# Altium PCB G5_Adapted.PcbDoc (part 2 of 2)
Units mil, origin at the board's own origin, x right, y up, seen from the top; angles counter-clockwise.
Board outline 3665.01 x 3900.74 mil, 4 copper layers (Top Layer, Int1, Int2, Bottom Layer), stack 53.912 mil thick; 133 components, 90 nets, 479 pads, 177 vias.
Unrouted connection lines stored in the file: 1.
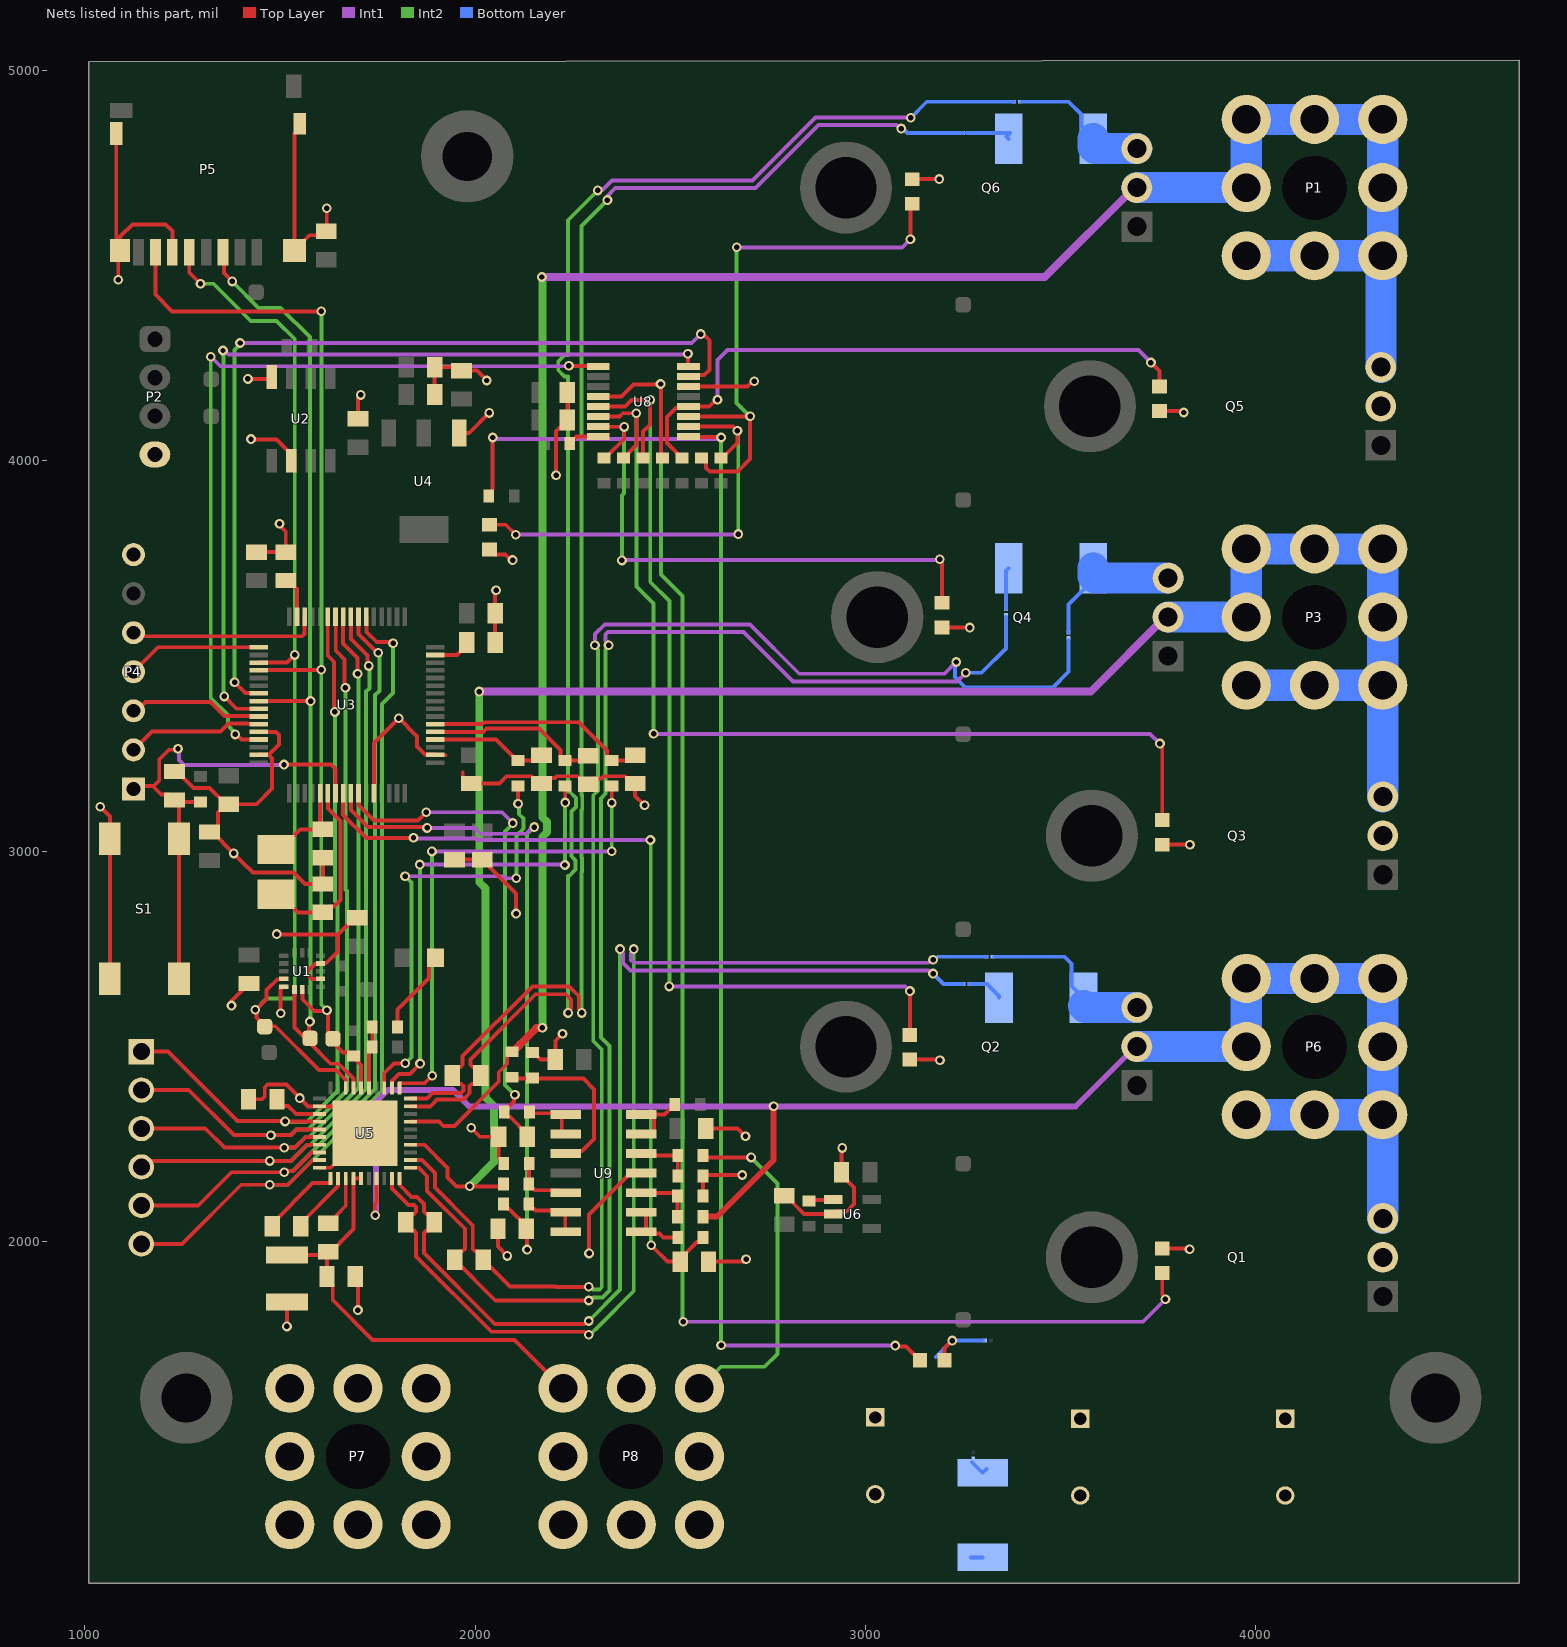
[diagram p4: the nets of this part, all layers, seen from the top]

## Via types
v1: diameter 25, hole 14, Top Layer to Bottom Layer, 177 vias

## Nets (pads, with @x,y where several pads share a name; then routed paths per layer and width w, separated by ;. In a path a pad name is that pad's centre, name@x,y a point inside that pad or via, vN(x,y) a via of type N, cw(c..) or ccw(c..) an arc to the next point about the centre after c; other vN are vias at no path point) (continued)
GND: C2.2 C3.2 C4.2 C6.2 C7.2 C11.1 C12.2 C13.1 C15.1 C17.2 C18.2 C19.2 C20.2 C21.2 C22.2 C23.2 C24.2 C25.2 C27.1 C28.1 C29.2 C30.2 C31.2 C33.2 C34.1 C35.1 C37.2 C38.1 C39.1 C40.1 C41.1 C42.2 C43.2 C44.1 NT2.2 NT6.2 NT8.2 NT10.2 P2.4 P4.7 P5.6 P5.11 P5.12 P5.13 P5.14 P7.1 R7.1 R9.1 R15.1 R17.1 R19.1 R34.1 R35.1 R36.1 RT1.2 RT2.2 RT3.2 RT4.2 RT5.2 RT6.2 RT7.2 RT8.2 S1.2 U1.5 U1.10 U1.12 U2.2 U2.8 U3.12 U3.18 U3.60 U3.63 U4.1 U5.32 U5.40 U5.41 U6.2 U8.14 U9.11 | length 8836.9
  Top Layer w10: v1(1040,3114) 1064.42,3089.58 S1.2@1064.42,3032.13 S1.2@1064.42,2673.87 ; P5.12@1080.75,4838.5 1080.75,4549.13 P5.13@1090.59,4539.29 ; v1(1086,4464) 1086,4534.7 P5.13@1090.59,4539.29 ; P5.6@1224.45,4534.37 1224.45,4588.55 1207,4606 1122,4606 1090.59,4574.59 P5.13@1090.59,4539.29 ; C19.2@1230,3204.42 1236.89,3204.42 1278.81,3162.5 1320.19,3162.5 C25.2@1362.11,3120.58 ; C34.1@1320,3049.42 C34.1@1326.89,3049.42 ; v1(1376,2605) 1376,2616.58 C15.1@1421,2661.58 ; v1(1418,4210) 1473.74,4210 U2.8@1478.94,4215.2 ; C3.2@1419.58,2365 1454.27,2365 1461.22,2371.95 1461.22,2395.62 1468.18,2402.57 1516.66,2402.57 1551,2368.23 v1(1551,2368) 1572.1,2346.9 U5.32@1601.86,2346.9 1649.1,2346.9 U5.41@1718,2278 1629.59,2189.59 1619.94,2189.59 1619.85,2189.5 1601.94,2189.5 U5.40@1601.86,2189.42 ; v1(1426,4056) 1427,4055 1491.3,4055 1528.94,4017.36 U2.2@1528.94,4000.63 ; C24.2@1440,3766.42 C11.1@1515,3766.42 1515,3818.94 1499,3834.94 v1(1499,3839) ; U3.60@1445.47,3306.1 1489.9,3306.1 1497.86,3298.14 1497.86,3274.03 1471.78,3247.95 1446.38,3247.95 U3.63@1445.47,3247.05 1446.38,3246.14 1471.78,3246.14 1480.09,3237.82 1480.09,3161.09 1439.58,3120.58 C25.2@1369,3120.58 C25.2@1362.11,3120.58 ; v1(1492,2788) 1493.17,2786.83 1648.52,2786.83 ; v1(1502,2585) 1502,2645.87 U1.5@1509.76,2653.63 ; v1(1518,1783) C27.1@1518,1845.96 ; P5.11@1551.22,4864.09 1551.22,4852.28 1537.44,4838.5 P5.14@1537.44,4539.29 1576.11,4577.96 1608.54,4577.96 C13.1@1619,4588.42 1620,4589.42 v1(1620,4647) ; U1.10@1604.24,2673.32 1582.68,2673.32 1571.13,2684.87 1571.13,2693.16 1589.75,2711.78 1603.34,2711.78 U1.12@1604.24,2712.68 1605.15,2713.59 1618.74,2713.59 1648.52,2743.37 1648.52,2786.83 ; C18.2@1610,2983.58 C17.2@1610,2916.42 1563.78,2916.42 1534.93,2945.27 1431.03,2945.27 1405.8,2970.51 v1(1381.65,2994.65) C34.1@1326.89,3049.42 ; C28.1@1691,1913.42 C28.1@1693.42,1911 1700,1904.42 v1(1700,1825) ; C7.2@1698,2829.42 1691.11,2829.42 1648.52,2786.83 ; C30.2@1700,4107.83 1700,4162 v1(1707,4169) ; 1741.65,3174.93 1741.65,3149.53 U3.12@1740.75,3148.62 1740.75,3277.04 v1(1804.71,3341) 1851.5,3294.21 1851.5,3268.38 1871.92,3247.95 1897.32,3247.95 U3.18@1898.23,3247.05 1899.13,3246.14 1924.53,3246.14 ; C42.2@1896.42,4170 C31.2@1896.42,4240 1956.42,4240 C43.2@1965,4231.42 2004.58,4231.42 v1(2030,4206) ; C20.2@1947,2978.58 C21.2@2018,2978.58 2105.07,2891.52 v1(2105.07,2840.48) ; U4.1@1959.49,4071.93 1984.93,4071.93 v1(2036,4123) ; 1968.43,3202.25 1968.43,3188.27 1983.11,3173.58 C22.2@1990,3173.58 ; C22.2@1983.06,3166.64 C22.2@1990,3173.58 ; v1(1990,2292) 2013,2269 C39.1@2060.58,2269 2060.58,2215.89 2073.52,2202.95 R35.1@2073.52,2200 R35.1@2073.52,2197.05 ; RT7.2@2037,3773.5 2049.72,3760.79 2077.15,3760.79 2091.94,3746 v1(2096,3746) ; C41.1@2047.74,2043.84 C41.1@2058.58,2033 2058.58,1987.31 v1(2082.13,1963.76) ; C12.2@2051.42,3535 C23.2@2051.42,3610 2051.42,3666.82 v1(2053.62,3669.02) ; R34.1@2147,2484.48 2149.95,2484.48 2167.43,2467 C44.1@2205.58,2467 2205.58,2514.72 v1(2223.84,2532.98) ; v1(2207.39,3963.33) 2207.39,4075.97 C35.1@2236.42,4105 C37.2@2236.42,4175 ; v1(2292,1970) 2292,2070 2398,2176 U9.11@2426,2176 ; v1(2434,3118) 2410,3142 C6.2@2410,3173.58 2403.11,3173.58 2384.39,3192.3 2328.71,3192.3 2323.26,3186.85 2304.69,3186.85 C4.2@2290,3172.17 2283.11,3172.17 2262.98,3192.3 2208.71,3192.3 2204.68,3188.27 2184.69,3188.27 C2.2@2170,3173.58 2163.11,3173.58 2144.39,3192.3 2080.79,3192.3 2062.07,3173.58 C22.2@1990,3173.58 ; U8.14@2546.73,4190.47 2697.41,4190.47 2710.94,4204 v1(2715,4204) ; R36.1@2583.48,2117 2583.72,2117.24 2583.72,2167.76 R9.1@2583.96,2168 2586.96,2171 v1(2684,2171) ; C38.1@2590.42,2290 2672.58,2290 v1(2692.54,2270.03) ; C40.1@2597.83,1949 2688,1949 v1(2694,1955) ; C33.2@2792,2117.42 2798.89,2117.42 2813.57,2102.73 2813.57,2099.84 2842.41,2071 U6.2@2917.79,2071 2924.6,2077.81 2951.81,2077.81 2971,2097 2971,2138.69 2938.58,2171.11 C29.2@2938.58,2178 2938.58,2238.66 v1(2940.15,2240.22) ; RT2.2@3113,2466.5 3188.8,2466.5 v1(3190.51,2464.79) ; RT6.2@3120,4721.5 3120.5,4722 v1(3189,4722) ; RT4.2@3196,3573.5 3196.5,3573 v1(3267,3573) ; RT8.2@3202.5,1696 3202.5,1727.5 v1(3222,1747) ; RT5.2@3753,4127.5 3811.5,4127.5 v1(3815,4124) ; RT1.2@3760,1982.99 3828.01,1982.99 v1(3830,1981) ; RT3.2@3760,3017.01 v1(3831,3017) ; C34.1@1326.89,3049.42 1341.57,3064.1 1341.57,3100.05 C25.2@1362.11,3120.58
  Bottom Layer w10: 3180,1705 v1(3222,1747) NT2.2@3301,1747 ; NT10.2@3260,4840 NT10.2@3265,4840 3370,4840 3361,4831 3360.73,4831 R19.1@3366.73,4825 ; NT6.2@3266,2660 3311.3,2660 3341.73,2629.57 R15.1@3341.73,2625 ; R7.1@3270.47,1191.73 R7.1@3300,1191.73 ; NT8.2@3360,3620 3360,3718.27 R17.1@3366.73,3725
GPIO1: U3.61 U8.1 | length 2063.1
  Top Layer w10: v1(1385.35,3299.5) 1388.83,3299.5 1401.91,3286.42 U3.61@1445.94,3286.42 ; v1(2240.38,4243.56) 2241.33,4242.61 2314.44,4242.61 U8.1@2315.39,4241.65
  Int1 w10: v1(1323,4267) 1347.5,4242.5 2239.31,4242.5 v1(2240.38,4243.56)
  Int2 w10: v1(1323,4267) 1323,3392.54 1366.7,3348.85 1366.7,3322.21 1385.35,3303.56 v1(1385.35,3299.5)
GPIO2: U3.57 U8.16 | length 2217.9
  Top Layer w10: v1(1357.72,3396.72) 1389.28,3365.16 U3.57@1445.94,3365.16 ; v1(2545.11,4274.5) 2545.11,4243.28 U8.16@2546.73,4241.65
  Int1 w10: v1(1354.23,4282.8) 1358.29,4282.8 1368.09,4273 2543.61,4273 v1(2545.11,4274.5)
  Int2 w10: v1(1354.23,4282.8) 1355.97,4281.05 1355.97,3398.46 v1(1357.72,3396.72)
GPIO3: U3.55 U8.15 | length 2303
  Top Layer w10: v1(1384,3433) 1411.57,3405.43 1445.04,3405.43 U3.55@1445.94,3404.53 ; U8.15@2546.73,4216.06 2550.59,4219.92 2586.92,4219.92 2600,4233 2600,4309 2584,4325 v1(2578,4325)
  Int1 w10: v1(1398,4302) 2555,4302 v1(2578,4325)
  Int2 w10: v1(1384,3433) 1384,4283.94 1398,4297.94 v1(1398,4302)
INHA: ?.1 U3.43 U5.34 | length 1924.5
  Top Layer w10: ?.1@1145,2486.85 1213.15,2486.85 1391,2309 1512.4,2309 1513.8,2307.61 1601.78,2307.61 U5.34@1601.86,2307.53 ; U3.43@1622.64,3600.91 1622.64,3501.86 1639,3485.5 1639,3359 v1(1641,3357)
  Int2 w10: v1(1513.18,2308.22) 1514.4,2307 1568.86,2307 1648,2386.14 1648,2866.04 1641,2873.04 v1(1641,3357)
INHB: ?.3 U3.41 U5.36 | length 1965.3
  Top Layer w10: ?.3@1145,2290 1308.91,2290 1357.91,2241 v1(1511,2241) 1539.05,2241 1566.21,2268.16 U5.36@1601.86,2268.16 ; U3.41@1662.01,3600.91 1662.01,3531.99 1698.85,3495.15 v1(1698.85,3454.89)
  Int2 w10: v1(1511,2241) 1539,2241 1567,2269 1576.12,2269 1701.42,2394.3 1701.42,3452.33 v1(1698.85,3454.89)
INHC: ?.5 U3.39 U5.38 | length 2071.7
  Top Layer w10: ?.5@1145,2093.15 1290.98,2093.15 1375.83,2178 v1(1511,2178) 1513.87,2180.87 1533.47,2180.87 1581.31,2228.71 1601.78,2228.71 U5.38@1601.86,2228.79 ; U3.39@1701.38,3600.91 1701.38,3556.87 1749.88,3508.37 v1(1751.88,3508.37)
  Int2 w10: v1(1511,2178) 1513.87,2180.87 1533.24,2180.87 1744,2391.63 1744,3400 1755,3411 1755,3478.73 1754.75,3478.98 1754.75,3505.5 v1(1751.88,3508.37)
INLA: ?.2 U3.42 U5.35 | length 1978.9
  Top Layer w10: ?.2@1145,2388.43 1266.57,2388.43 1382,2273 v1(1477,2273) 1528.17,2273 1543.01,2287.84 U5.35@1601.86,2287.84 ; U3.42@1642.32,3600.91 1643,3600.23 1643,3514 1665.7,3491.3 1665.7,3421.02 v1(1667.77,3418.95)
  Int2 w10: v1(1477,2273) 1528,2273 1543,2288 1572.49,2288 1672,2387.51 1672,2899.08 1668.5,2902.58 1668.5,3418.22 v1(1667.77,3418.95)
INLB: ?.4 U3.40 U5.37 | length 2036.1
  Top Layer w10: ?.4@1145,2191.57 1159.87,2191.57 1175.36,2207.06 1527.74,2207.06 1569.15,2248.47 U5.37@1601.86,2248.47 ; U3.40@1681.69,3600.91 1681.69,3544.31 1724.63,3501.37 1724.63,3477.87 v1(1727.5,3475)
  Int2 w10: v1(1474.13,2207.06) 1528.06,2207.06 1569,2248 1577.75,2248 1721,2391.25 1721,3409 1729,3417 1729,3473.5 v1(1727.5,3475)
INLC: ?.6 U3.38 U5.39 | length 2210.5
  Top Layer w10: ?.6@1145,1994.72 1249.72,1994.72 1401,2146 v1(1474,2146) 1521.23,2146 1584.25,2209.02 1601.78,2209.02 U5.39@1601.86,2209.1 ; U3.38@1721.06,3600.91 1721.97,3600 1721.97,3561.86 1747.96,3535.87 1787.13,3535.87 v1(1790,3533)
  Int2 w10: v1(1474,2146) 1521,2146 1761.21,2386.21 1761.21,3377.21 1790,3406 v1(1790,3533)
ISENA: C2.1 R20.2 U3.20 | length 300.4
  Top Layer w10: U3.20@1897.76,3286.42 2053.11,3286.42 2107.05,3232.48 R20.2@2110,3232.48 2156.06,3232.48 C2.1@2170,3246.42
ISENB: C4.1 R21.2 U3.21 | length 445.8
  Top Layer w10: U3.21@1897.76,3306.1 2020.52,3306.1 2028.92,3314.5 2163.73,3314.5 2218.27,3259.97 2218.27,3241.26 2227.05,3232.48 R21.2@2230,3232.48 2277.48,3232.48 C4.1@2290,3245
ISENC: C6.1 R22.2 U3.22 | length 570.7
  Top Layer w10: U3.22@1897.76,3325.79 2017.58,3325.79 2022.29,3330.5 2266.32,3330.5 2338.27,3258.55 2338.27,3241.26 2347.05,3232.48 R22.2@2350,3232.48 2396.06,3232.48 C6.1@2410,3246.42
MA: P6.1 Q1.3 Q2.2 R33.1 U5.7 | length 4576.3
  Top Layer w10: v1(1744,2068) 1744,2096.97 1747.53,2100.5 U5.7@1747.53,2161.86
  Top Layer w15: R33.1@2583.48,2064 2583.81,2064.33 2619.76,2064.33 2764.5,2209.07 v1(2764.5,2346.78)
  Int1 w15: v1(1744,2068) 1745.91,2069.91 1745.91,2091.51 1746.06,2091.66 1746.06,2358.06 1777,2389 1942.7,2389 1985.35,2346.35 3537.94,2346.35 3691.59,2500 Q2.2@3695.08,2500
  Bottom Layer w80: Q2.2@3695.08,2500 P6.1@3975.39,2500 P6.1@3975.39,2674.61 P6.1@4150,2674.61 P6.1@4324.61,2674.61 P6.1@4324.61,2500 P6.1@4324.61,2325.39 ; P6.1@3975.39,2325.39 P6.1@4150,2325.39 P6.1@4324.61,2325.39 ; Q1.3@4325.08,2060 4325.08,2324.92 P6.1@4324.61,2325.39
MB: P3.1 Q3.3 Q4.2 R32.1 U5.14 | length 5159.8
  Top Layer w10: U5.14@1834.14,2248.47 1869.9,2248.47 1929,2189.37 1929,2165 1952,2142 v1(1986,2142) 2066.52,2142 R32.1@2072.52,2148
  Int1 w20: v1(2010.51,3409.13) 3577.11,3409.13 3767.98,3600 Q4.2@3775,3600
  Int2 w20: v1(1986,2142) 2048.5,2204.5 2048.5,2347.12 2027,2368.62 2027,2904.72 2010.51,2921.21 v1(2010.51,3409.13)
  Bottom Layer w80: Q4.2@3775,3600 P3.1@3975.39,3600 P3.1@3975.39,3774.61 P3.1@4150,3774.61 P3.1@4324.61,3774.61 P3.1@4324.61,3600 P3.1@4324.61,3425.39 ; P3.1@3975.39,3425.39 P3.1@4150,3425.39 P3.1@4324.61,3425.39 ; Q3.3@4325.08,3140 4325.08,3424.92 P3.1@4324.61,3425.39
MC: P1.1 Q5.3 Q6.2 R30.1 U5.17 | length 5815.9
  Top Layer w10: U5.17@1834.14,2307.53 1907.7,2307.53 1918.39,2296.84 1947.08,2296.84 2060.46,2410.23 2060.46,2434.05 2082.27,2455.86 2082.27,2477.7 2091.05,2486.48 R30.1@2094,2486.48
  Top Layer w20: R30.1@2094,2486.48 2096.95,2486.48 2114.27,2503.8 2114.27,2504.89 2156.54,2547.16 2171.35,2547.16 v1(2172.31,2548.12)
  Int1 w20: v1(2171.05,4471.04) 3459.09,4471.04 3688.05,4700 Q6.2@3695.08,4700
  Int2 w20: v1(2171.05,4471.04) 2172.31,4469.78 2172.31,3087.37 2184,3075.68 2184,3048.76 2172.31,3037.06 v1(2172.31,2548.12)
  Bottom Layer w80: Q6.2@3695.08,4700 P1.1@3975.39,4700 P1.1@3975.39,4874.61 P1.1@4150,4874.61 P1.1@4324.61,4874.61 P1.1@4324.61,4700 P1.1@4324.61,4525.39 ; P1.1@3975.39,4525.39 P1.1@4150,4525.39 P1.1@4324.61,4525.39 ; Q5.3@4320,4240 4320,4520.79 P1.1@4324.61,4525.39
NetC1_1: C1.1 U5.1 | length 210.2
  Top Layer w10: C1.1@1480.58,2040 1480.58,2046.89 1583.82,2150.13 1629.34,2150.13 1629.42,2150.2 U5.1@1629.42,2161.86
NetC1_2: C1.2 U5.2 | length 161.5
  Top Layer w10: C1.2@1553.42,2040 1553.42,2046.89 1649.02,2142.5 1649.02,2161.78 U5.2@1649.1,2161.86
NetC3_1: C3.1 U5.33 | length 141.6
  Top Layer w10: C3.1@1490.02,2379 1490.02,2364.86 1507.1,2347.77 1521.24,2347.77 1541.81,2327.21 U5.33@1601.86,2327.21
NetC5_1: C5.1 U5.3 | length 137
  Top Layer w10: C5.1@1624,2047.42 1630.89,2047.42 1645.57,2062.1 1645.57,2068.99 1668.79,2092.2 U5.3@1668.79,2161.86
NetC10_2: C10.2 C14.2 C16.2 NT1.2 R7.2 | length 52.3
  Bottom Layer w10: R7.2@3273,1435.27 R7.2@3300,1408.27 R7.2@3310,1418.27
NetC11_2: C11.2 U3.47 | length 108.7
  Top Layer w10: C11.2@1515,3693.58 1521.89,3693.58 1543.9,3671.57 U3.47@1543.9,3600.91
NetC12_1: C12.1 U3.31 | length 98.1
  Top Layer w10: U3.31@1897.76,3502.95 1953.43,3502.95 1978.58,3528.11 C12.1@1978.58,3535
NetC17_1: C17.1 U3.6 Y1.1 | length 484.7
  Top Layer w10: Y1.1@1490,2890 1499.84,2890 1546.26,2843.58 C17.1@1610,2843.58 1624.69,2858.27 1638.27,2858.27 1655,2875 1655,3077.75 1623.54,3109.2 1623.54,3148.19 U3.6@1622.64,3149.09
NetC18_1: C18.1 U3.5 Y1.2 | length 236.9
  Top Layer w10: Y1.2@1490,3005 1499.84,3005 1551.26,3056.42 C18.1@1610,3056.42 1602.95,3063.46 U3.5@1602.95,3149.09
NetD1_1: D1.1 R3.1 | length 217.5
  Top Layer w10: R3.1@1801.48,2550 1801.48,2595.22 1881.61,2675.35 1881.61,2710.8 D1.1@1898.27,2727.46
NetNT5_2: NT5.2 Q2.3 R15.2 | length 464.1
  Bottom Layer w10: 3330,2730 3510,2730 3527.83,2712.17 3527.83,2655.43 R15.2@3558.27,2625 R15.2@3558.27,2604.61
  Bottom Layer w80: R15.2@3558.27,2604.61 3562.83,2600.04 3695.04,2600.04 Q2.3@3695.08,2600
NetNT7_2: NT7.2 Q4.3 R17.2 | length 383.6
  Bottom Layer w10: NT7.2@3520,3561 3520,3632 ; 3520,3632.2 3583.27,3695.47 R17.2@3583.27,3704.61
  Bottom Layer w80: R17.2@3583.27,3725 3583.27,3704.61 3587.83,3700.04 3747.83,3700.04 3747.87,3700 Q4.3@3775,3700
NetNT9_2: NT9.2 Q6.3 R19.2 | length 375.3
  Bottom Layer w10: 3400,4920 3520,4920 3552.83,4887.17 3552.83,4855.43 R19.2@3583.27,4825
  Bottom Layer w80: R19.2@3583.27,4825 3583.27,4804.61 3587.83,4800.04 3695.04,4800.04 Q6.3@3695.08,4800
NetR9_2: R9.2 R13.1 U9.12 | length 120
  Top Layer w10: U9.12@2452,2221 R13.1@2519,2221 R9.2@2519,2168
NetR11_1: R11.1 U6.1 | length 64.4
  Top Layer w10: R11.1@2855,2104.48 2856.96,2106.44 2915.83,2106.44 U6.1@2917.79,2108.4
NetR18_1: R18.1 U9.13 U9.14 | length 155.6
  Top Layer w10: U9.14@2426,2326 2437.64,2326 U9.14@2454,2326 ; U9.13@2458,2274 2458,2320 2452,2326 2451.43,2326 2485.52,2326 2499.79,2340.27 2502.74,2340.27 2511.52,2349.05 R18.1@2511.52,2352
NetR23_1: R23.1 U8.8 | length 81.9
  Top Layer w10: R23.1@2242.48,4045 2242.48,4047.95 2251.26,4056.73 2254.21,4056.73 2260,4062.52 U8.8@2315.39,4062.52
NetR27_1: R27.1 U9.1 U9.2 | length 143
  Top Layer w10: R27.1@2139.48,2332 2142.48,2329 U9.1@2222,2329 ; U9.2@2222,2281 U9.1@2222,2329 ; U9.1@2232,2326 2229,2329 U9.1@2222,2329
NetR28_1: R28.1 U9.6 U9.7 | length 150.4
  Top Layer w10: R28.1@2137.48,2097 2137.48,2094.05 2146.26,2085.27 2149.21,2085.27 2154.48,2080 2226,2080 U9.6@2230,2076 ; U9.7@2231,2029 2231,2075 U9.6@2232,2076
NetR29_1: R29.1 U9.8 U9.9 | length 149.2
  Top Layer w10: U9.8@2426,2026 2431.11,2020.89 2472.11,2020.89 2482,2011 R29.1@2519,2011 ; U9.8@2438,2021 U9.9@2438,2071
NetR30_2: R30.2 R34.2 U9.3 | length 433.4
  Top Layer w10: R30.2@2099.96,2418 2147,2418 2277.14,2418 2305,2390.14 2305,2263 2274,2232 2239.43,2232 U9.3@2231.43,2224
NetR32_2: R32.2 R35.2 U9.5 | length 136.3
  Top Layer w10: R35.2@2138.48,2200 2137.98,2199.5 2137.98,2148.5 R32.2@2137.48,2148 2137.48,2145.05 2146.26,2136.27 2149.21,2136.27 2153.48,2132 U9.5@2213,2132
NetR33_2: R33.2 R36.2 U9.10 | length 115.5
  Top Layer w10: U9.10@2460,2125 2510.52,2125 R36.2@2518.52,2117 2518.52,2064.48 2519,2064 R33.2@2518.52,2064
nFAULT: R2.2 R3.2 U5.25 | length 159.5
  Top Layer w10: U5.25@1727.84,2394.14 1727.84,2490.32 R2.2@1736.52,2499 R3.2@1736.52,2550
RESET: C19.1 P4.1 R37.2 S1.1 U3.7 | length 1285.3
  Top Layer w10: P4.1@1125,3160 1132,3167 1174.35,3167 1196.14,3145.2 1216.38,3145.2 C19.1@1235.06,3126.52 ; 1175.67,3165.67 1191,3181 1191,3235 1216.13,3260.13 1236.13,3260.13 v1(1239,3263) ; S1.1@1241.58,2673.87 S1.1@1241.58,3032.13 1241.58,3120 C19.1@1235.06,3126.52 ; R37.2@1297,3126.52 C19.1@1235.06,3126.52 ; v1(1510.5,3222.15) 1631.29,3222.15 1642.32,3211.12 U3.7@1642.32,3149.09
  Int1 w10: v1(1239,3263) 1241.87,3260.13 1241.87,3234.13 1255,3221 1509.35,3221 v1(1510.5,3222.15)
RX: P4.2 U3.59 | length 360.7
  Top Layer w10: P4.2@1125,3260 1172.31,3307.31 1348.31,3307.31 1368,3327 1416.86,3327 1417.17,3326.69 1445.04,3326.69 U3.59@1445.94,3325.79
  Int1 w10: P4.2@1125,3260 P4.2@1133.15,3251.85
SA_N: C8.1 NT6.1 U5.10 | length 2657.2
  Top Layer w10: U5.10@1806.9,2161.54 1806.9,2145.01 1837.39,2114.52 1851.43,2114.52 1869,2096.95 1869,2077.43 1874.86,2071.57 1880.73,2071.57 1895.42,2056.89 C8.1@1895.42,2050 1895.42,2043.11 1880.73,2028.43 1874.86,2028.43 1869,2022.57 1869,1970.77 2050.27,1789.5 2279.44,1789.5
  Int1 w10: v1(2371.35,2749.56) 2371.35,2745.5 2378.85,2738 2378.85,2713.77 2398.12,2694.5 3161.44,2694.5 3168.94,2687 v1(3173,2687)
  Int2 w10: v1(2291,1797) 2371.35,1877.35 v1(2371.35,2749.56)
  Bottom Layer w10: v1(3173,2687) 3200,2660 NT6.1@3250,2660
SA_P: C8.2 NT5.1 U5.9 | length 2746.7
  Top Layer w10: U5.9@1786.9,2161.86 1786.9,2136.73 1829.11,2094.52 1843.14,2094.52 1849,2088.66 1849,2077.43 1843.14,2071.57 1837.27,2071.57 1822.58,2056.89 C8.2@1822.58,2050 1822.58,2043.11 1837.27,2028.43 1843.14,2028.43 1849,2022.57 1849,1962.48 2041.98,1769.5 2279.44,1769.5
  Int1 w10: v1(2406.35,2749.56) 2406.35,2745.5 2398.85,2738 2398.85,2722.06 2406.41,2714.5 3161.44,2714.5
  Int2 w10: v1(2291,1762) 2294.89,1762 2318.5,1785.61 2406.35,1873.46 v1(2406.35,2749.56)
  Bottom Layer w10: v1(3173,2722) 3177.06,2722 3185.06,2730 NT5.1@3310,2730
SB_N: C9.1 NT8.1 U5.11 | length 3655.4
  Top Layer w10: U5.11@1834.14,2189.42 1855.86,2189.42 1855.86,2188.97 1877,2167.83 1877,2130.23 1974,2033.23 1974,1981.43 1968.14,1975.57 1962.27,1975.57 1947.58,1960.89 C9.1@1947.58,1954 2051.58,1850 2192.96,1850 2193.46,1849.5 v1(2291,1849.5)
  Int1 w10: v1(2342,3528) 2342,3532.06 2334.5,3539.56 2334.5,3555.5 2340.36,3561.36 2687.5,3561.36 2814,3434.86 3234.38,3434.86 v1(3256.95,3457.42)
  Int2 w10: v1(2291,1849.5) 2294.56,1849.5 2302.56,1857.5 2326.78,1857.5 2344.36,1875.07 2344.36,2500.87 2322.5,2522.73 2322.5,3135.39 2334.5,3147.39 2334.5,3516.44
  Bottom Layer w10: v1@3256.95,3460.17 v1(3256.95,3457.42) 3297.42,3457.42 3360,3520 NT8.1@3360,3600
SB_P: C9.2 NT7.1 U5.12 | length 3805
  Top Layer w10: U5.12@1834.14,2209.1 1864.02,2209.1 1897,2176.12 1897,2138.52 1994,2041.52 1994,1981.43 1999.86,1975.57 2005.73,1975.57 2020.42,1960.89 C9.2@2020.42,1954 2089.42,1885 2207.46,1885 2207.96,1884.5 v1(2291,1884.5)
  Int1 w10: v1(2307,3528) 2307,3556.28 2332.07,3581.36 2703.85,3581.36 2830.35,3454.86 3202.14,3454.86 v1(3232.2,3484.92)
  Int2 w10: v1(2291,1884.5) 2295.06,1884.5 2302.06,1877.5 2318.5,1877.5 2324.36,1883.36 2324.36,2492.59 2302.5,2514.45 2302.5,3143.68 2314.5,3155.68 2314.5,3516.44
  Bottom Layer w10: v1(3232.2,3484.92) 3229.45,3482.17 3229.45,3446.03 3255.48,3420 3480,3420 3520,3460 3520,3540
SC_N: C26.1 NT10.1 U5.20 | length 3792.7
  Top Layer w10: U5.20@1834.14,2366.58 1834.46,2366.9 1876.9,2366.9 1890.51,2380.5 1963.56,2380.5 1970,2386.94 1970,2398.57 1964.14,2404.43 1956.27,2404.43 1941.58,2419.11 C26.1@1941.58,2426 1941.58,2432.89 1956.27,2447.57 1962.14,2447.57 1968,2453.43 1968,2475.34 2146.66,2654 2240.43,2654 2265.5,2628.93 2265.5,2597.56
  Int1 w10: v1(2339,4668) 2341.87,4670.87 2341.87,4681.48 2359,4698.61 2718.61,4698.61 2880,4860 3078.93,4860 3087.61,4851.32 v1(3091.67,4851.32)
  Int2 w10: v1(2273,2586) 2273,2946.48 2273.5,2946.98 2273.5,2983.02 2273,2983.52 2273,3105.48 2274.5,3106.98 2274.5,3143.02 2273,3144.52 2273,4602 v1(2339,4668)
  Bottom Layer w10: v1(3091.67,4851.32) 3095.73,4851.32 3107.05,4840 NT10.1@3250,4840
SC_P: C26.2 NT9.1 U5.19 | length 3999.7
  Top Layer w10: U5.19@1834.14,2346.9 1885.19,2346.9 1902.79,2364.5 1970.18,2364.5 1986,2380.32 1986,2398.57 1991.86,2404.43 1999.73,2404.43 2014.42,2419.11 C26.2@2014.42,2426 2014.42,2432.89 1999.73,2447.57 1993.86,2447.57 1988,2453.43 1988,2467.06 2154.94,2634 2232.14,2634 2245.5,2620.64 2245.5,2597.56
  Int1 w10: v1(2314.25,4692.75) 2317.12,4695.62 2327.73,4695.62 2350.72,4718.61 2710.32,4718.61 2871.72,4880 3114.57,4880 v1(3115.75,4878.82)
  Int2 w10: v1(2238,2586) 2238,2937.5 2241.39,2937.5 2257.5,2953.61 2257.5,2976.39 2246.5,2987.39 2246.5,3101.61 2258.5,3113.61 2258.5,3136.39 2242.39,3152.5 2238,3152.5 2238,4216.06 2228.99,4216.06 2212.88,4232.17 2212.88,4254.95 2228.99,4271.06 2238,4271.06 2238,4616.5 v1(2314.25,4692.75)
  Bottom Layer w10: v1(3115.75,4878.82) 3156.93,4920 NT9.1@3380,4920
SCLK: P5.5 TP9.0 U1.4 U3.51 U5.28 | length 2738.3
  Top Layer w10: P5.5@1267.76,4534.37 1267.76,4482.6 v1(1296.65,4453.71) ; v1@1439.87,2591.87 1439.87,2574.75 1460,2554.62 1460,2552 1488,2552 1600.13,2439.87 1643.53,2439.87 1668.71,2414.69 1668.71,2394.22 U5.28@1668.79,2394.14 ; v1@1442,2597.87 1466,2621.87 1466,2644.77 1493.64,2672.41 1508.85,2672.41 U1.4@1509.76,2673.32 ; U3.51@1445.94,3483.27 1518.27,3483.27 v1(1538,3503)
  Int2 w10: v1(1296.65,4453.71) 1330.29,4453.71 1425.42,4358.58 1491.42,4358.58 1538,4312 v1(1538,3503) 1538,2628.86 1532.14,2623 1466,2623 v1(1437,2594)
SDI: P5.3 TP11.0 U1.6 U3.56 U5.27 | length 2608.3
  Top Layer w10: P5.3@1354.37,4534.37 1356.77,4531.97 1356.77,4480.86 v1(1377.99,4459.65) ; U3.56@1445.94,3384.84 1446.02,3384.92 1578.42,3384.92 v1(1578.5,3385) ; U1.6@1537.32,2645.76 1537.32,2601.43 1537.42,2601.32 1537.42,2548.58 TP11.0@1573,2513 ; v1(1577,2564) 1575,2562 1575,2515 TP11.0@1573,2513 ; U5.27@1688.47,2394.14 1688.39,2394.22 1688.39,2417.63 1650.15,2455.87 1630.13,2455.87 TP11.0@1573,2513
  Int2 w10: v1(1377.99,4459.65) 1445.63,4392 1502,4392 1577,4317 1577,3387 v1@1579,3385 ; v1(1577,2564) 1578,2565 1578,3384.5 v1(1578.5,3385)
SDO: P5.7 R1.2 TP10.0 U1.7 U3.52 U5.26 | length 2851.2
  Top Layer w10: P5.7@1181.14,4534.37 1181.14,4425.86 1224,4383 1606,4383 v1(1606.19,4383.19) ; U3.52@1445.94,3463.58 1446.68,3464.32 1605.26,3464.32 v1(1606,3465.06) ; U1.7@1557,2645.76 1557.91,2644.85 1557.91,2621.09 1588,2591 1618.5,2591 v1(1620.5,2593) ; v1@1620.5,2591 1623.37,2588.13 1623.37,2522.63 1661.7,2484.3 1676.7,2484.3 1708.16,2452.84 U5.26@1708.16,2394.14
  Int2 w10: v1(1606.19,4383.19) 1606.09,4383.09 1606.09,3465.15 v1(1606,3465.06) 1606,2607.5 v1(1620.5,2593)
SOA: R20.1 U5.23 | length 1131.9
  Top Layer w10: U5.23@1767.21,2394.14 1767.21,2432.21 1792,2457 v1(1821.34,2457) ; v1(2110,3122) R20.1@2110,3167.52
  Int1 w10: v1(1820.71,2936.25) 1820.84,2936.13 2073,2936.13 2078,2931.13 2105.37,2931.13 v1(2105.5,2931)
  Int2 w10: v1(1820.71,2936.25) 1837,2919.96 1837,2472.65 v1(1821.34,2457) ; v1(2105.5,2931) 2106.5,2932 2106.5,3040.39 2124,3057.89 2124,3083.89 2112.87,3095.02 2112.87,3119.13 v1(2110,3122)
SOB: R21.1 U5.22 | length 1194.3
  Top Layer w10: U5.22@1786.9,2394.14 1786.98,2394.22 1786.98,2411.75 1804.73,2429.5 1832.73,2429.5 1859.05,2455.81 v1(1859.05,2456.22) ; R21.1@2230,3167.52 2231,3166.52 v1(2231,3125)
  Int1 w10: v1(1858,2966) 2229,2966 v1(2230,2965)
  Int2 w10: v1(1858,2966) 1858.52,2965.48 1858.52,2456.74 v1(1859.05,2456.22) ; v1(2230,2965) 2230.5,2965.5 2230.5,3124.5 v1(2231,3125)
SOC: R22.1 U5.21 | length 1306.1
  Top Layer w10: U5.21@1806.58,2394.14 1806.58,2405.8 1806.66,2405.87 1870.18,2405.87 1889.31,2425 v1(1889.95,2425) ; v1(2350,3124) R22.1@2350,3167.52
  Int1 w10: v1(1889.47,2999.86) 2349.86,2999.86 v1(2350,3000)
  Int2 w10: v1(1889.47,2999.86) 1889.95,2999.39 v1(1889.95,2425) ; v1(2350,3000) v1(2350,3124)
SWCLK: P4.4 U3.49 | length 346.9
  Top Layer w10: P4.4@1125,3460 1187.64,3522.64 U3.49@1445.94,3522.64
SWDIO: P4.5 U3.46 | length 488.3
  Top Layer w10: P4.5@1125,3560 1134,3551 1556.82,3551 1562.68,3556.86 1562.68,3600 U3.46@1563.58,3600.91
TEMP_1: R5.2 RT1.1 U8.4 | length 4121.2
  Top Layer w10: U8.4@2316.08,4165.57 U8.4@2315.39,4164.88 2374.66,4164.88 2405.77,4196 2474,4196 v1(2475,4197) 2476,4196 2476,4011.48 R5.2@2480,4007.48 ; RT1.1@3760,1920 3760,1864.88 3768.13,1856.75 v1(3768.13,1852.69)
  Int1 w10: v1(2533,1795) 3710.43,1795 v1(3768.13,1852.69)
  Int2 w10: v1(2475,4197) 2476.13,4195.87 2476.13,3708.87 2531,3654 2531,1797 v1(2533,1795)
TEMP_2: R6.1 RT2.1 U8.5 | length 2557.2
  Top Layer w10: U8.5@2315.39,4139.29 2383.54,4139.29 2400.45,4156.2 2448.63,4156.2 2448.63,4093.52 2430,4074.89 R6.1@2430,4007.48 ; v1@2497.5,2650.44 v1(2497.5,2654) ; RT2.1@3113,2529.5 3113.76,2530.26 v1(3113.76,2641.96)
  Int1 w10: v1(2497.5,2654) 3101.72,2654 v1(3113.76,2641.96)
  Int2 w10: v1(2448.5,4156.2) 2448.63,4156.08 2448.63,3690.37 2498,3641 2498,2654.5 v1(2497.5,2654)
TEMP_3: R10.1 RT3.1 U8.6 | length 2576
  Top Layer w10: U8.6@2315.39,4113.7 2369.81,4113.7 2378.11,4122 v1(2413,4122) 2413,4040.48 2391.73,4019.21 2391.73,4016.26 2382.95,4007.48 R10.1@2380,4007.48 ; v1(3754,3276) 3754,3271.94 3760,3265.94 RT3.1@3760,3080
  Int1 w10: v1(2457,3301) 3729,3301 v1(3754,3276)
  Int2 w10: v1(2413,4122) 2413,3678.46 2457,3634.46 v1(2457,3301)
TEMP_4: R14.1 RT4.1 U8.7 | length 1444.9
  Top Layer w10: U8.7@2316.34,4089.06 U8.7@2315.39,4088.11 2315.95,4087.56 2381.44,4087.56 v1(2382,4087) 2382,4056.53 2332.95,4007.48 R14.1@2330,4007.48 ; v1(3190,3748) 3190,3743.94 3196,3737.94 RT4.1@3196,3636.5
  Int1 w10: v1(2376,3745) 2377.5,3746.5 3188.5,3746.5 v1(3190,3748)
  Int2 w10: v1(2376,3745) 2376,3911.82 2381.5,3917.32 2381.5,4086.5 v1(2382,4087)
TEMP_5: R24.1 RT5.1 U8.12 | length 1577.7
  Top Layer w10: R24.1@2530,4007.48 2527.05,4007.48 2518.27,4016.26 2518.27,4019.21 2492,4045.48 2492,4112.42 2515.01,4135.43 2542.87,4135.43 U8.12@2546.73,4139.29 2599.61,4139.29 2616.84,4156.52 v1(2620.9,4156.52) ; v1(3731,4252) 3753,4230 RT5.1@3753,4190.5
  Int1 w10: v1(2620.9,4156.52) 2620.9,4258.9 2646,4284 3699,4284 v1(3731,4252)
  Int2 w10: v1@2619.95,4157.47 v1(2620.9,4156.52)
TEMP_6: R25.1 RT6.1 U8.11 | length 1422
  Top Layer w10: U8.11@2546.73,4113.7 2547.02,4113.99 2703.99,4113.99 v1(2704.28,4114.28) 2704.28,4004.46 2672.82,3973 2601,3973 2591.73,3982.27 2591.73,3998.7 2582.95,4007.48 R25.1@2580,4007.48 ; v1(3115,4568) 3115,4653.5 RT6.1@3120,4658.5
  Int1 w10: v1(2670,4547) 3094,4547 v1(3115,4568)
  Int2 w10: v1(2670,4547) 2670,4148.55 v1(2704.28,4114.28)
TEMP_7: R26.1 RT7.1 U8.10 | length 1131.8
  Top Layer w10: RT7.1@2037,3836.5 2078.5,3836.5 v1(2104,3811) ; U8.10@2546.73,4088.11 2660.89,4088.11 v1(2672,4077) 2672,4046.53 2632.95,4007.48 R26.1@2630,4007.48
  Int1 w10: v1(2104,3811) 2104.86,3811.86 2672.97,3811.86 v1(2673.83,3812.72)
  Int2 w10: v1(2672,4077) 2674,4075 2674,3812.89 v1(2673.83,3812.72)
TEMP_8: R31.1 RT8.1 U8.9 | length 3666.7
  Top Layer w10: R31.1@2040,3920 2042.09,3920 2043.82,3921.73 2043.82,3926.41 2045,3927.59 v1(2045,4060) ; U8.9@2546.73,4062.52 2547.99,4061.26 2628.74,4061.26 v1(2630,4060) ; v1(3076,1734) 3078,1732 3103.5,1732 3125.8,1709.7 3126.79,1709.7 3139.5,1696.98 RT8.1@3139.5,1696
  Int1 w10: v1(2045,4060) 2047.87,4057.13 2057.73,4057.13 2058.36,4056.5 2222.47,4056.5 2622.44,4056.5 2625.94,4060 v1(2630,4060) ; v1(2630,1735) 2630.5,1734.5 3075.5,1734.5 v1(3076,1734)
  Int2 w10: v1(2630,1735) v1(2630,4060)
TX: P4.3 U3.58 | length 345.4
  Top Layer w10: P4.3@1125,3360 1133.13,3360 1155.39,3382.26 1321.74,3382.26 1357.62,3346.38 1445.04,3346.38 U3.58@1445.94,3345.47
VBATT: C5.2 C10.1 C14.1 C16.1 C27.2 C28.2 P8.1 Q1.2 Q3.2 Q5.2 R13.2 U5.4 U5.5 | length 2056.2
  Top Layer w10: C27.2@1518,1966.04 1615.46,1966.04 C5.2@1620.58,1971.17 ; U5.5@1708.16,2161.86 U5.4@1688.47,2161.86 1688.55,2161.78 1688.55,2120.44 1688.47,2120.36 1688.47,2032.87 1653.43,1997.82 1653.43,1997.12 1630.89,1974.58 C5.2@1624,1974.58 C5.2@1620.58,1971.17 ; P8.1@2225.39,1624.61 2101.18,1748.82 1737.29,1748.82 1635.27,1850.84 1635.27,1889.43 1618.94,1905.75 1615.33,1905.75 C28.2@1620.58,1911 C5.2@1620.58,1971.17 ; R13.2@2583.96,2221 2588.96,2216 v1(2707,2216)
  Int2 w10: P8.1@2574.61,1624.61 2629.76,1679.76 2741.17,1679.76 2774.13,1712.72 2774.13,2148.87 v1(2707,2216)
VSENSE_MA: C40.2 R29.2 U3.8 | length 2095.1
  Top Layer w10: U3.8@1662.01,3149.09 1662.01,3093.36 1721.37,3034 1841,3034 1842,3035 v1(1842.22,3035) ; v1(2451,1991) 2493,1949 C40.2@2525,1949 2525,1955.89 2568.38,1999.27 2575.18,1999.27 2583.96,2008.05 R29.2@2583.96,2011
  Int1 w10: v1(1842.22,3035) 1842.11,3034.89 1844.5,3032.5 2003.01,3032.5 2006.51,3029 v1(2449,3029) ; v1@2446.94,1991 v1(2451,1991)
  Int2 w10: v1(2449,3029) 2450,3028 2450,1992 v1(2451,1991)
VSENSE_MB: C41.2 R28.2 U3.9 | length 1779.8
  Top Layer w10: U3.9@1681.69,3149.09 1681.69,3106.31 1725.5,3062.5 1874.5,3062.5 v1(1877,3060) ; R28.2@2072.52,2097 2072.52,2094.05 2081.3,2085.27 2086.04,2085.27 2131.42,2039.89 C41.2@2131.42,2033 2133,2031.42 v1(2133,1980)
  Int1 w10: v1(1877,3060) 1998.14,3060 2013.14,3045 2130.22,3045 2147.44,3062.22 v1(2151.5,3062.22)
  Int2 w10: v1(2133,1980) 2133,3043.72 v1(2151.5,3062.22)
VSENSE_MC: C39.2 R27.2 U3.10 | length 1323.8
  Top Layer w10: U3.10@1701.38,3149.09 1702.28,3148.19 1702.28,3117.38 1741.16,3078.5 1853.5,3078.5 v1(1875,3100) ; v1(2102,2376.35) 2099.13,2373.48 2099.13,2359.56 2074.52,2334.95 R27.2@2074.52,2332 2074.52,2329.05 2083.3,2320.27 2089.04,2320.27 2133.42,2275.89 C39.2@2133.42,2269
  Int1 w10: v1(1875,3100) 2069,3100 v1(2096.5,3072.5)
  Int2 w10: v1(2096.5,3072.5) 2096.5,3070.11 2077,3050.61 2077,2401.35 v1(2102,2376.35)
pads on no net: P1.MH1 P3.MH1 P5.1 P5.8 P5.9 P5.10 P6.MH1 P7.MH1 P8.MH1 Q1.4.1 Q2.4.1 Q3.4.1 Q4.4.1 Q5.4.1 Q6.4.1 U1.2 U1.3 U1.9 U1.11 U1.13 U1.15 U1.16 U3.1 U3.3 U3.4 U3.11 U3.15 U3.23 U3.24 U3.25 U3.26 U3.27 U3.28 U3.33 U3.34 U3.35 U3.36 U3.37 U3.50 U3.53 U3.54 U8.3

## Polygon pours and split planes (outlines as drawn)
GND on Bottom Layer "GND_L04_P001" (solid, pour order 1): 1010,1125 4675,1125 4675,5025.74 4671.76,5022.5 1010,5022.5
NetC10_2 on Bottom Layer "NetC10_2" (solid, pour order 0): 2900,1475 2900,1300 4150,1300 4150,1475
no net on Bottom Layer "NONET_L04_P003" (solid, pour order 3): 1010,5022.5 2677.5,5022.5 2700,5000 2700,1800 1000,1800 1010,1810
no net on Bottom Layer "NONET_L04_P002" (solid, pour order 2): 1000,5000 2700,5000 2700,1700 1000,1700
3.3V on Top Layer "3.3V_L01_P004" (solid, remove dead copper, pour order 4): 1010,5022.5 1012.49,5025 3075,5025 3075,1850 1000.45,1850
VBATT on Top Layer "VBATT_L01_P006" (solid, pour order 6): 3200,5000 3200,1800 1020,1800 1020,1140 4660,1140 4660,5000

## Keep-outs
Keep-Out Layer:
  lines w10: 980,1100 4700,1100 4700,5040 980,5040 980,1100

## Silkscreen, mask and mechanical layers (free items; w line width, h text height)
Top Overlay:
  text "MA" at 4590,4590 h60 r90
  text "Programming" at 1222,3568 h30 r90
  text "MB" at 4570,3550 h60 r90
  text "G5 Adapted / Harshit Madaan / Shaheer Rana" at 3000,2660 h60 r90
  text "MA" at 4610,2450 h60 r90
  text "PWM_CONTROL" at 1048,1813.83 h35
  text "VBATT" at 2712,1388 h35 r90
  text "GROUND" at 2012,1348 h35 r90
Bottom Overlay:
  text "CAN" at 1288,3908 h30